# EAGLE board BitBeacon_Type_02 (EAGLE 7.3.0)
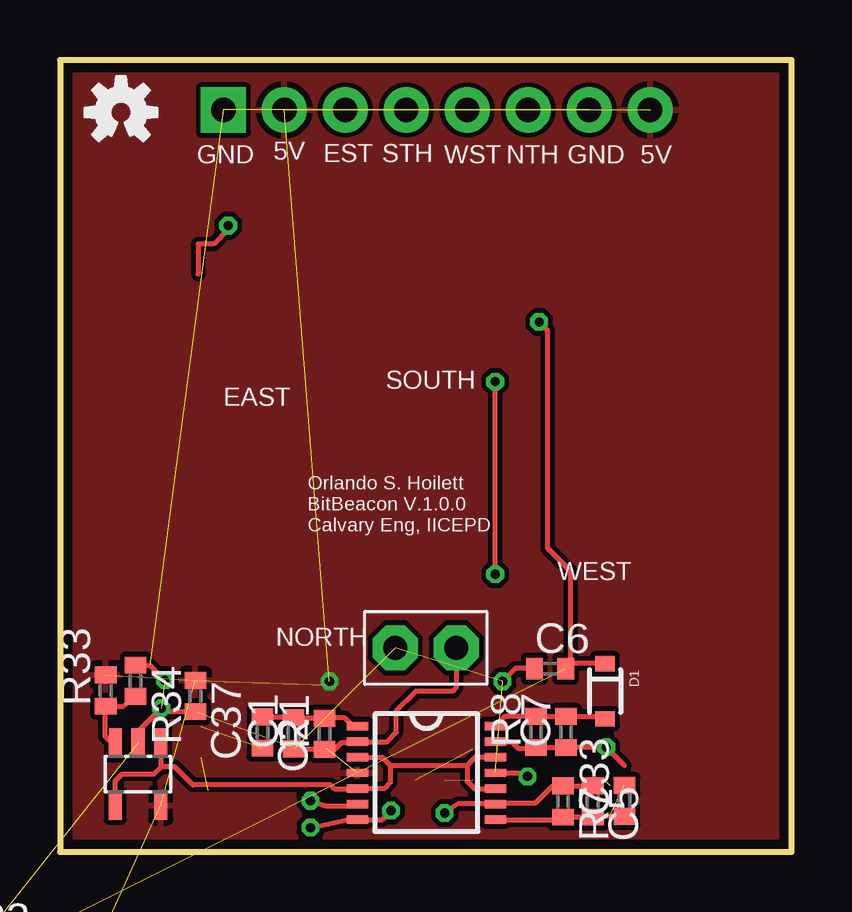
[diagram p0: board, top side]
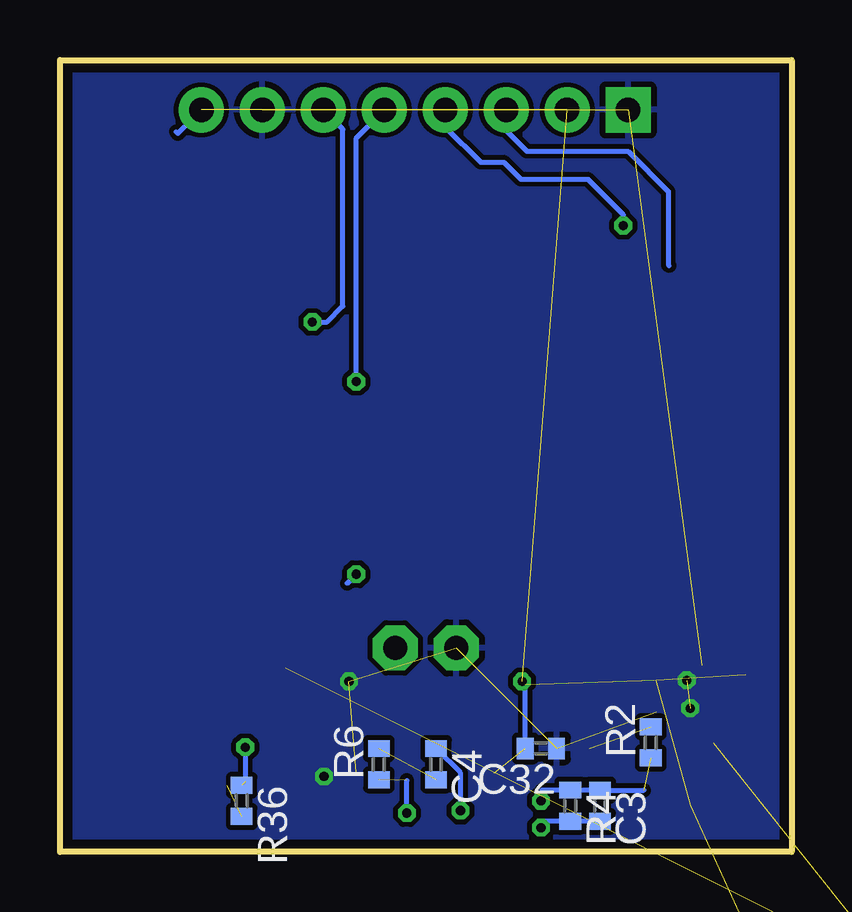
[diagram p1: board, bottom side, seen from below]

Size 30.48 x 33.02 mm. Coordinates in mm from the lower left corner, seen from the top.
Outline: 0,0 30.48,0 30.48,33.02 0,33.02 0,0
Copper layers (1*16): Top 0.0356mm / dielectric 1.5011mm / Bottom 0.0356mm
Design rules "LaenPCBOrder": minimum track width 6mil, minimum drill 13mil, track to track 6mil, track to pad 6mil, pad to pad 6mil, via to via 6mil, smd to smd 6mil, copper to edge 15mil, drill to drill 6mil, minimum pad ring 7mil, minimum via ring 7mil, stop-mask expansion 3mil, vias tented up to drill 0mil, thermal gap 10mil

## Footprints (pad centres in the part's own frame; a part is rotated, then mirrored left to right if it is on the bottom)
C0402 = smd 0.7 x 0.9: 1 -0.65,0; 2 0.65,0
SOD-323 = smd 0.63 x 0.83: A 1.15,0; C -1.15,0
SOT23-5 = smd 0.55 x 1.2: 1 -0.95,-1.3; 2 0,-1.3; 3 0.95,-1.3; 4 0.95,1.3; 5 -0.95,1.3
MSOP08 = smd 0.4 x 1: 1 -0.976,-2.263; 2 -0.326,-2.263; 3 0.324,-2.263; 4 0.974,-2.263; 5 0.974,2.262; 6 0.324,2.262; 7 -0.326,2.262; 8 -0.976,2.262
1X08_PIN1_NO_SILK = drill 1.016 pad 1.88 square: 1 0,0 | drill 1.016 pad 1.88: 2 2.54,0; 3 5.08,0; 4 7.62,0; 5 10.16,0; 6 12.7,0; 7 15.24,0; 8 17.78,0
TSSOP14 = smd 0.9 x 0.35: 1 -2.875,1.95; 2 -2.875,1.3; 3 -2.875,0.65; 4 -2.875,0; 5 -2.875,-0.65; 6 -2.875,-1.3; 7 -2.875,-1.95; 8 2.875,-1.95; 9 2.875,-1.3; 10 2.875,-0.65; 11 2.875,0; 12 2.875,0.65; 13 2.875,1.3; 14 2.875,1.95
PIN-PHOTODIODE = drill 1.016 pad 1.88 octagon: 1 -1.27,0; 2 1.27,0
LED-0603 = smd 1 x 1: A 0,-0.677; C 0,0.877
R0402 = smd 0.7 x 0.9: 1 -0.65,0; 2 0.65,0

## Placement (x,y rotation side)
C1  22p  [C0402]  9.73,4.95 90 top
C2  [C0402]  8.43,4.98 270 top
C3  22p  [C0402]  7.98,1.93 270 bottom
C4  [C0402]  14.81,3.66 270 bottom
C5  22p  [C0402]  22.2,2.11 270 top
C6  100n  [C0402]  20.42,7.65 0 top
C7  22p  [C0402]  21.08,5 90 top
C8  700p  [C0402]  -20.83,-31.24 0 top  (outside the outline)
C32  100n  [C0402]  10.44,4.32 180 bottom
C33  [C0402]  23.52,2.13 90 top
C37  100n  [C0402]  5.64,6.5 270 top
D1  250mA/100V  [SOD-323]  22.71,6.71 270 top
IC1  AD8603UJ  [SOT23-5]  3.25,3.25 180 top
IC2  AD8607RM  [MSOP08]  -10.77,-21.08 0 top  (outside the outline)
IC3  AD8607RM  [MSOP08]  -18.34,-21.08 0 top  (outside the outline)
JP2  [1X08_PIN1_NO_SILK]  6.81,30.94 0 top
LOGO1  OSHW-LOGOS  [OSHW-LOGO-S]  2.54,30.84 0 top
N-AMP  AD8608  [TSSOP14]  15.27,3.3 0 top
N-PD1  BPW46  [PIN-PHOTODIODE]  15.24,8.51 0 top
N-PD2  BPW46  [PIN-PHOTODIODE]  -19.46,-35.26 0 top  (outside the outline)
ON  GREEN  [LED-0603]  -5.69,-19.2 0 top  (outside the outline)
R1  1k  [R0402]  11.02,4.93 90 top
R2  [R0402]  5.87,4.57 90 bottom
R3  1M  [R0402]  -2.9,-4.01 0 top  (outside the outline)
R4  1M  [R0402]  9.22,1.93 270 bottom
R5  22k  [R0402]  -20.88,-26.47 0 top  (outside the outline)
R6  [R0402]  17.2,3.66 90 bottom
R7  1M  [R0402]  20.95,2.11 270 top
R8  1M  [R0402]  19.84,5 90 top
R19  [R0402]  -5.74,-23.11 0 top  (outside the outline)
R33  [R0402]  1.91,6.73 90 top
R34  [R0402]  3.15,7.14 270 top
R36  [R0402]  22.91,2.13 270 bottom

## Library data of the parts
C1-C8 C32 C33 C37 R1-R8 R19 R33 R34 R36 = resistor
D1 = SparkFun-DiscreteSemi; PROD_ID: DIO-09646
IC1 = analog-devices; MF: ALTERA CORPORATION; MPN: AD8603AUJZ-REEL7; OC_FARNELL: 1651290; OC_NEWARK: 59K6904
IC2 IC3 = analog-devices; MF: ALTERA CORPORATION; MPN: AD8607ARMZ-REEL; OC_FARNELL: 1464990; OC_NEWARK: 59K6925
JP2 = SparkFun-Connectors
LOGO1 = SparkFun-Aesthetics
N-AMP = analog-devices; MF: ALTERA CORPORATION; MPN: AD8609ARUZ; OC_FARNELL: 1464994; OC_NEWARK: 59K6934
N-PD1 N-PD2 = Orlando
ON = SparkFun-LED; PROD_ID: DIO-00821

## Nets
1/2-VDD-N: IC1.1 IC1.4 N-AMP.3 N-AMP.5 N-AMP.10 N-AMP.12
5V: C32.2 C37.1 IC1.5 JP2.2 JP2.8 N-AMP.4 ON.A R33.2
E-OUT: JP2.3
GND: C6.1 C32.1 C37.2 IC1.2 JP2.1 JP2.7 N-AMP.11 N-PD1.1 N-PD2.1 R3.1 R19.1 R34.1
N$1: C1.1 N-AMP.2 N-PD1.2 R1.1
N$2: C8.1 IC2.2 N-PD2.2 R5.1
N$3: C1.2 C2.1 N-AMP.1 R1.2
N$4: C8.2 IC2.1 R5.2
N$5: C3.1 N-AMP.6 R2.1 R4.1
N$6: C3.2 C4.1 N-AMP.7 R4.2
N$7: C5.1 N-AMP.9 R6.1 R7.1
N$8: C5.2 C33.1 N-AMP.8 R7.2
N$9: IC1.3 R33.1 R34.2
N$10: C7.1 N-AMP.13 R8.1 R36.1
N$11: C7.2 D1.A N-AMP.14 R8.2
N$27: C2.2 R2.2
N$34: C4.2 R6.2
N$35: C33.2 R36.2
N$48: ON.C R19.2
N-OUT: C6.2 D1.C JP2.6 R3.2
S-OUT: JP2.4
V+: IC2.8 IC3.8
V-: IC2.4 IC3.4
VREF: IC2.3
W-OUT: JP2.5

## Tracks (layer width: path | path; a pad name or v marks a point on that pad's centre or on a via)
1/2-VDD-N
  Top 0.203: N-AMP.3 13.42,3.95 13.77,3.61 | 13.77,3.61 13.77,2.9 13.51,2.64 N-AMP.5 11.43,2.64 11.28,2.79 5.54,2.79 4.78,3.56 4.22,3.56 | N-AMP.12 17.31,3.95 16.97,3.61 | 16.97,3.61 16.97,2.95 17.27,2.64 N-AMP.10 | 4.22,4.28 IC1.1 4.22,4.54 4.22,3.56 | 13.77,3.61 16.97,3.61 | IC1.4 2.3,2.96 2.59,3.25 3.91,3.25 4.22,3.56
5V  (via drill 0.38)  (7 unrouted)
  Bottom 0.203: JP2.8 25.57,29.95 25.64,30.02 | C32.2 11.09,6.97 v11.23,7.11
  pour Top (isolate 0.203): 30.48,33.02 30.48,0 0,0 0,33.02
E-OUT
  Bottom 0.203: JP2.3 11.89,30.07 11.02,29.21 6.81,29.21 5.13,27.53 5.13,24.47 5.1,24.44
GND  (via drill 0.38)  (10 unrouted)
  Top 0.203: N-AMP.11 19.33,3.3 v19.48,3.15 | C6.1 18.97,7.64 v18.44,7.11 | R34.1 3.74,7.79 v4.37,7.16 | C37.2 4.36,5.85 v4.22,5.99 3.25,5.03 IC1.2
  pour Bottom (isolate 0.203): 30.48,33.02 30.48,0 0,0 0,33.02
N$1
  Top 0.203: N-PD1.2 16.51,6.86 16.36,6.71 14.83,6.71 14.02,5.89 14.02,4.98 13.64,4.6 N-AMP.2 12.36,4.57 11.73,4.57 11.44,4.28 R1.1 11,4.3 C1.1
N$2  (3 unrouted)
N$3
  Top 0.203: N-AMP.1 12.2,5.25 11.86,5.59 11.03,5.59 R1.2 10.01,5.58 C1.2 9.7,5.63 C2.1
N$4  (2 unrouted)
N$5  (via drill 0.38)  (1 unrouted)
  Top 0.203: v10.44,2.13 11.05,1.93 12.32,1.93 N-AMP.6
  Bottom 0.203: v10.44,2.13 10.4,2.58 R4.1 C3.1 6.15,2.58
N$6  (via drill 0.38)
  Top 0.203: v13.79,1.73 13.42,1.35 N-AMP.7 12.32,1.42 v10.44,1.02
  Bottom 0.203: 14.64,4.17 C4.1 13.79,3.29 v13.79,1.73 | C3.2 R4.2 10.3,1.28 v10.44,1.02
N$7  (via drill 0.38)  (1 unrouted)
  Top 0.203: v16.03,1.63 16.57,2 N-AMP.9 18.17,2.03 19.81,2.03 20.54,2.76 R7.1 C5.1
  Bottom 0.203: v16.03,1.63 16.03,2.98
N$8
  Top 0.203: N-AMP.8 20.85,1.35 R7.2 C5.2 22.23,1.48 C33.1
N$9
  Top 0.203: R34.2 2.64,6.08 R33.1 1.88,6.06 1.88,4.83 2.15,4.55 IC1.3
N$10  (via drill 0.38)  (1 unrouted)
  Top 0.203: N-AMP.13 18.82,4.6 19.1,4.32 19.8,4.32 R8.1 C7.1 21.1,4.37 v22.76,4.37 23.52,3.61
  Bottom 0.203: v22.76,4.37 22.76,2.94
N$11
  Top 0.203: N-AMP.14 18.54,5.65 R8.2 C7.2 22.61,5.65 D1.A
N$27  (1 unrouted)
N$34  (1 unrouted)
N$35  (1 unrouted)
N$48  (1 unrouted)
N-OUT  (via drill 0.38)  (1 unrouted)
  Top 0.203: D1.C 21.28,7.86 | 21.28,7.86 C6.2 | 21.28,7.86 21.28,11.69 20.32,12.65 20.32,21.74 v19.96,22.1
  Bottom 0.203: JP2.6 18.69,30.12 18.69,22.76 19.36,22.1 v19.96,22.1
S-OUT  (via drill 0.38)
  Top 0.203: v7.01,26.11 7.01,25.96 6.4,25.35 5.75,25.35 5.75,24.08
  Bottom 0.203: JP2.4 14.43,30.23 12.95,28.75 11.99,28.75 11.28,28.04 8.48,28.04 7.01,26.57 v7.01,26.11
V+  (1 unrouted)
V-  (1 unrouted)
W-OUT  (via drill 0.38)
  Top 0.203: v18.14,11.58 v18.14,19.61
  Bottom 0.203: JP2.5 18.14,29.77 v18.14,19.61 | 18.52,11.2 v18.14,11.58

## Text on the board
tPlace: GND | 5V | EST | STH | WST | NTH | GND | 5V
_tsilk: EAST | SOUTH | Orlando S. Hoilett / BitBeacon V.1.0.0 / Calvary Eng, IICEPD | WEST | NORTH